# EAGLE board STEM (EAGLE 8.3.2)
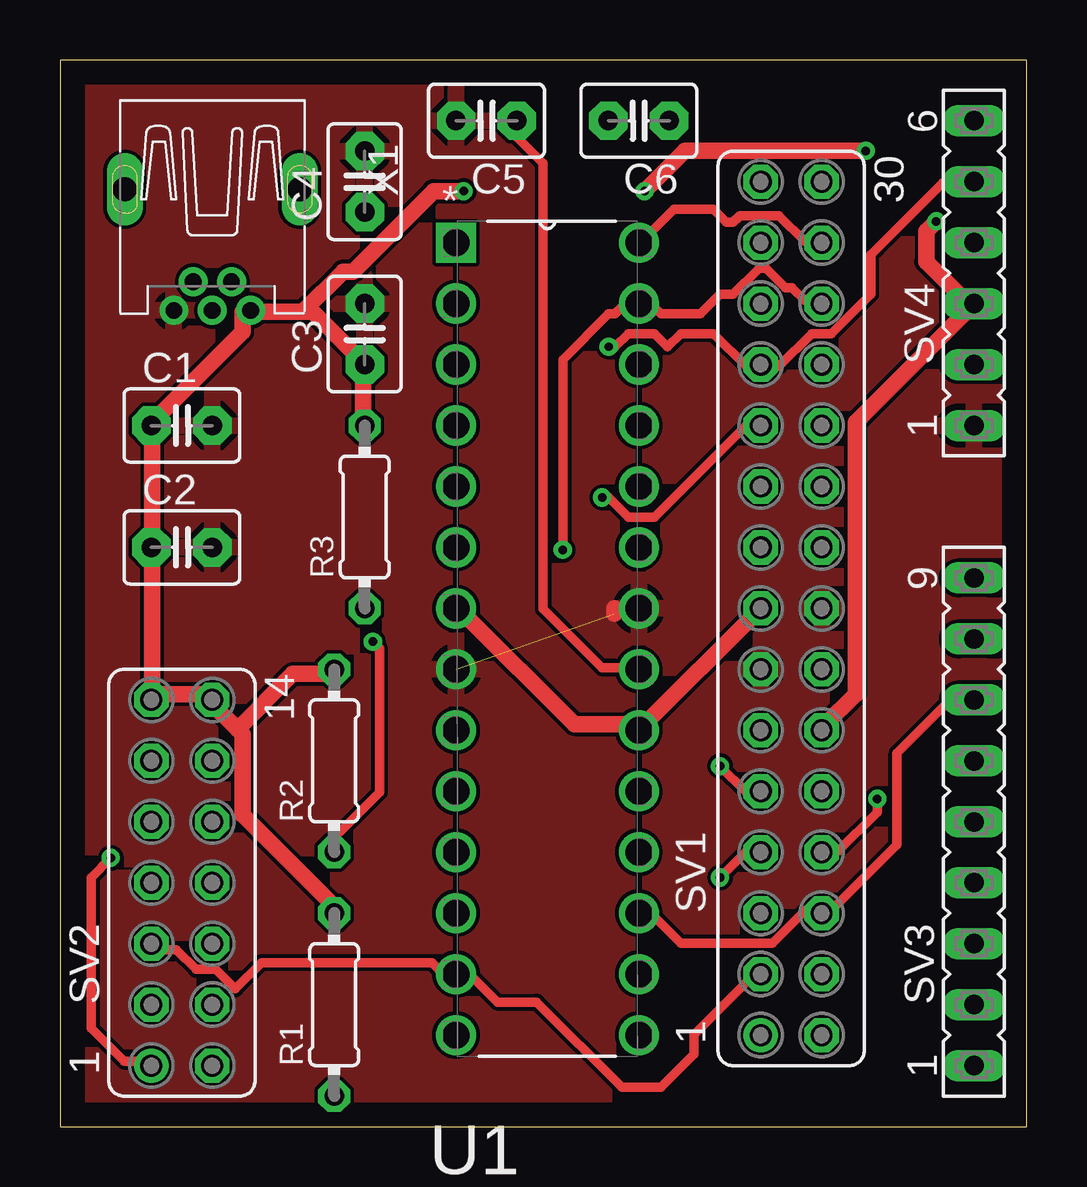
[diagram p0: board, top side]
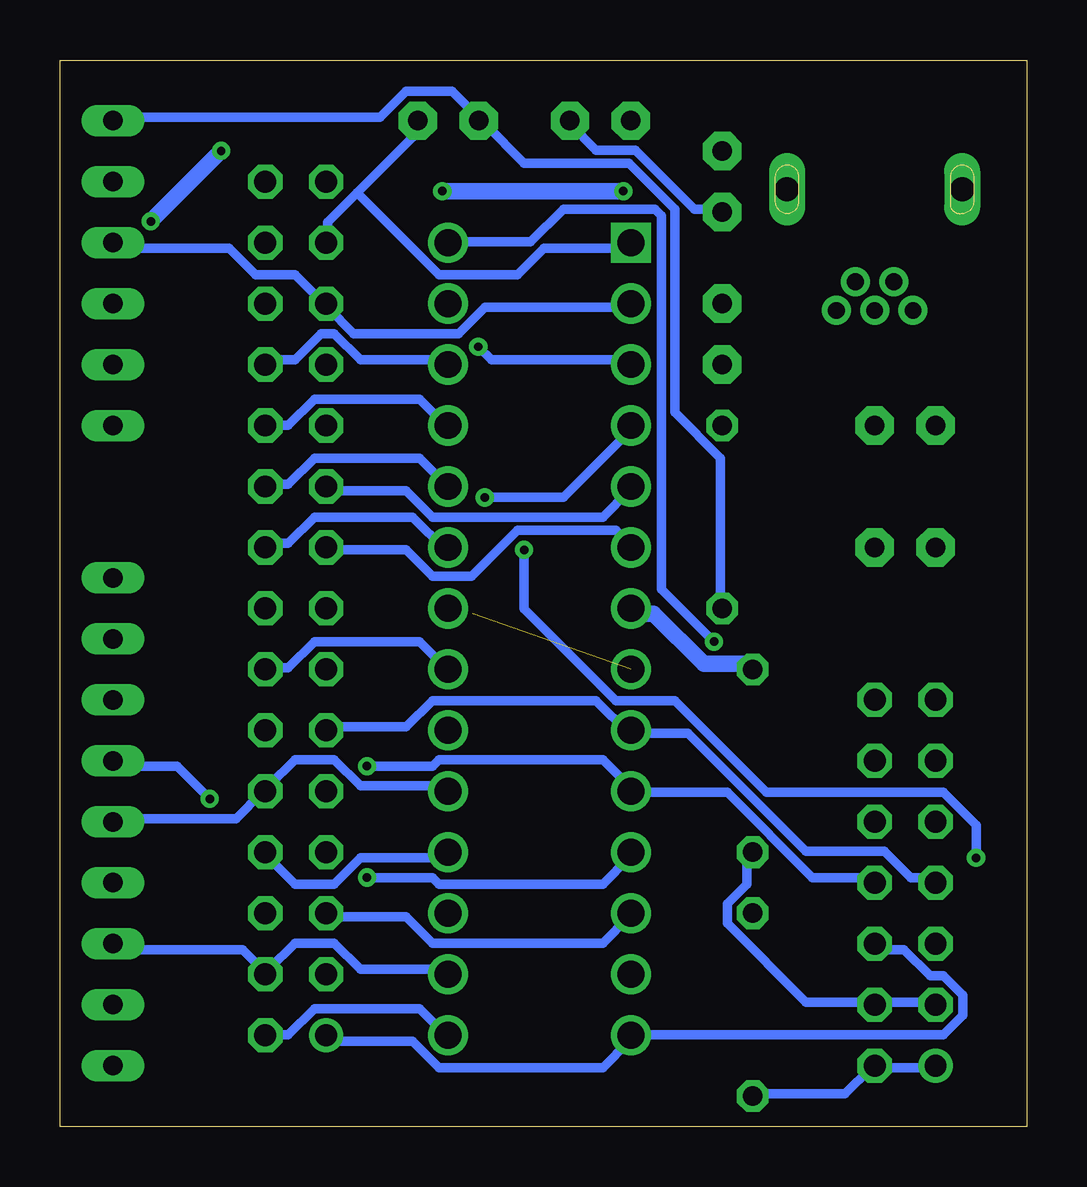
[diagram p1: board, bottom side, seen from below]

Size 40.31 x 44.44 mm. Coordinates in mm from the lower left corner, seen from the top.
Outline: 0,0 40.31,0 40.31,44.44 0,44.44 0,0
Copper layers (1*16): Top 0.035mm / dielectric 1.5mm / Bottom 0.035mm
Design rules "default *": minimum track width 27mil, minimum drill 0.35mm, track to track 6mil, track to pad 6mil, pad to pad 6mil, via to via 6mil, smd to smd 6mil, copper to edge 40mil, drill to drill 6mil, minimum pad ring 10mil, minimum via ring 8mil, stop-mask expansion 4mil, vias tented up to drill 0mil, thermal gap 10mil

## Footprints (pad centres in the part's own frame; a part is rotated, then mirrored left to right if it is on the bottom)
C2.5-3 = drill 0.813 pad 1.6 octagon: 1 -1.27,0; 2 1.27,0
0204/7 = drill 0.813 octagon: 1 -3.81,0; 2 3.81,0
FE15-2 = drill 0.914: 1 -17.78,1.27 | drill 0.914 octagon: 2 -17.78,-1.27; 3 -15.24,1.27; 4 -15.24,-1.27; 5 -12.7,1.27; 6 -12.7,-1.27; 7 -10.16,1.27; 8 -10.16,-1.27; 9 -7.62,1.27; 10 -7.62,-1.27; 11 -5.08,1.27; 12 -5.08,-1.27; 13 -2.54,1.27; 14 -2.54,-1.27; 15 0,1.27; 16 0,-1.27; 17 2.54,1.27; 18 2.54,-1.27; 19 5.08,1.27; 20 5.08,-1.27; 21 7.62,1.27; 22 7.62,-1.27; 23 10.16,1.27; 24 10.16,-1.27; 25 12.7,1.27; 26 12.7,-1.27; 27 15.24,1.27; 28 15.24,-1.27; 29 17.78,1.27; 30 17.78,-1.27
FE07-2 = drill 0.914: 1 -7.62,1.27 | drill 0.914 octagon: 2 -7.62,-1.27; 3 -5.08,1.27; 4 -5.08,-1.27; 5 -2.54,1.27; 6 -2.54,-1.27; 7 0,1.27; 8 0,-1.27; 9 2.54,1.27; 10 2.54,-1.27; 11 5.08,1.27; 12 5.08,-1.27; 13 7.62,1.27; 14 7.62,-1.27
FE09 = drill 0.813 long: 1 -10.16,0; 2 -7.62,0; 3 -5.08,0; 4 -2.54,0; 5 0,0; 6 2.54,0; 7 5.08,0; 8 7.62,0; 9 10.16,0
FE06 = drill 0.813 long: 1 -6.35,0; 2 -3.81,0; 3 -1.27,0; 4 1.27,0; 5 3.81,0; 6 6.35,0
DIP254P762X457-28 = drill 1.118 square: 1 -7.62,33.02 | drill 1.118: 2 -7.62,30.48; 3 -7.62,27.94; 4 -7.62,25.4; 5 -7.62,22.86; 6 -7.62,20.32; 7 -7.62,17.78; 8 -7.62,15.24; 9 -7.62,12.7; 10 -7.62,10.16; 11 -7.62,7.62; 12 -7.62,5.08; 13 -7.62,2.54; 14 -7.62,0; 15 0,0; 16 0,2.54; 17 0,5.08; 18 0,7.62; 19 0,10.16; 20 0,12.7; 21 0,15.24; 22 0,17.78; 23 0,20.32; 24 0,22.86; 25 0,25.4; 26 0,27.94; 27 0,30.48; 28 0,33.02
32005-601 = drill 0.7 pad 1.016: 1 2.825,1.6; 2 1.625,0.8; 3 2.825,0; 4 1.625,-0.8; 5 2.825,-1.6 | drill 1 pad 1.422 long: M1 -2.225,3.65; M2 -2.225,-3.65

## Placement (x,y rotation side)
C1  [C2.5-3]  5.08,29.21 0 top
C2  [C2.5-3]  5.08,24.13 0 top
C3  [C2.5-3]  12.7,33.02 90 top
C4  [C2.5-3]  12.7,39.37 90 top
C5  [C2.5-3]  17.78,41.91 180 top
C6  [C2.5-3]  24.13,41.91 180 top
R1  [0204/7]  11.43,5.08 90 top
R2  [0204/7]  11.43,15.24 90 top
R3  [0204/7]  12.7,25.4 90 top
SV1  [FE15-2]  30.48,21.59 90 top
SV2  [FE07-2]  5.08,10.16 90 top
SV3  [FE09]  38.1,12.7 90 top
SV4  [FE06]  38.1,35.56 90 top
U1  ATMEGA328P-PU  [DIP254P762X457-28]  24.13,3.81 0 top
X1  MINI-USB_SHIELD5P2-32005-601  [32005-601]  6.35,36.83 270 top

## Library data of the parts
C1-C6 = capacitor-wima
R1-R3 = rcl
SV1-SV4 = con-lsta; OC_FARNELL: unknown; OC_NEWARK: unknown
U1 = Atmel_By_element14_Batch_1-00; MPN: ATMEGA328P-PU; OC_FARNELL: 1715487; OC_NEWARK: 15R0268; PACKAGE: PDIP-28; SUPPLIER: Atmel
X1 = con-cypressindustries; OC_FARNELL: unknown; OC_NEWARK: unknown

## Nets
AREF: C4.1 C5.1 SV1.14 U1.21
GND: C1.2 C2.2 C3.2 C4.2 C5.2 SV1.13 SV1.16 SV4.1 U1.8 U1.22 X1.5
PB0: SV1.1 SV2.6 U1.14
PB1: SV1.2 U1.15
PB2: SV1.4 SV3.3 U1.16
PB3: SV1.6 SV3.7 U1.17
PB4: SV1.8 SV3.6 U1.18
PB5: SV1.10 SV3.5 U1.19
PB6: SV1.11 SV2.7 U1.9
PB7: SV1.9 SV2.8 U1.10
PC0: SV1.18 U1.23
PC1: SV1.20 U1.24
PC2: SV1.22 U1.25
PC3: SV1.24 U1.26
PC4: R1.1 SV1.26 SV2.1 SV2.2 U1.27
PC5: R2.1 SV1.28 SV2.3 SV2.4 U1.28
PC6: C6.1 SV1.27 U1.1
PC62: C6.2 R3.1 SV4.6
PD0: SV1.25 SV4.4 U1.2
PD1: SV1.23 SV4.5 U1.3
PD2: SV1.21 U1.4
PD3: SV1.19 U1.5
PD4: SV1.17 U1.6
PD5: SV1.7 U1.11
PD6: SV1.5 U1.12
PD7: SV1.3 SV2.5 U1.13
VCC: C1.1 C2.1 C3.1 R1.2 R2.2 R3.2 SV1.12 SV1.15 SV2.13 SV2.14 SV4.3 U1.7 U1.20 X1.1

## Tracks (layer width: path | path; a pad name or v marks a point on that pad's centre or on a via)
AREF
  Top 0.394: C5.1 19.05,41.23 20.14,40.14 20.14,21.57 22.6,19.11 23.96,19.11 U1.21
  Bottom 0.394: SV1.14 31.61,19.11 30.79,19.11 29.7,20.21 25.33,20.21 24.24,19.11 U1.21 | C4.1 12.77,38.23 13.86,38.23 16.32,40.68 17.96,40.68 19.05,41.78 C5.1
GND  (1 unrouted)
  Top 0.686: 23.11,21.37 23.11,21.59
  pour Top: 0,44.45 40.64,44.45 40.64,0 0,0
PB0
  Bottom 0.394: SV2.6 6.22,7.37 5.12,7.37 4.03,6.28 3.49,6.28 2.67,5.46 2.67,4.64 3.49,3.82 16.32,3.82 U1.14 16.59,3.55 17.68,2.46 24.51,2.46 25.6,3.55 29.15,3.55 SV1.1
PB1
  Bottom 0.394: SV1.2 31.61,3.82 30.79,3.82 29.7,4.92 25.33,4.92 24.24,3.82 U1.15
PB2
  Bottom 0.394: SV3.3 37.89,7.37 32.7,7.37 31.88,6.55 SV1.4 31.61,6.55 30.52,7.64 28.88,7.64 27.79,6.55 24.24,6.55 U1.16
PB3
  Top 0.394: SV3.7 37.89,17.75 37.07,17.75 34.89,15.56 34.89,11.74 31.88,8.74 SV1.6 31.61,9.01 31.06,9.01 29.7,7.64 25.88,7.64 24.78,8.74 24.24,8.74 U1.17
PB4  (via drill 0.35)
  Top 0.394: v34.07,13.65 34.07,13.11 32.43,11.47 31.88,11.47 SV1.8
  Bottom 0.394: v34.07,13.65 35.43,15.02 37.89,15.02 SV3.6 | U1.18 24.24,11.2 27.79,11.2 28.88,10.1 30.52,10.1 31.61,11.2 SV1.8
PB5
  Bottom 0.394: SV3.5 37.89,12.83 32.98,12.83 31.88,13.93 SV1.10 31.61,14.2 30.52,15.29 28.88,15.29 27.79,14.2 24.24,14.2 U1.19
PB6
  Bottom 0.394: SV2.7 4.03,10.38 4.85,10.38 5.94,11.47 9.22,11.47 14.13,16.38 16.32,16.38 U1.9 16.59,16.38 17.96,17.75 24.78,17.75 25.88,16.66 29.15,16.66 SV1.11
PB7  (via drill 0.35)
  Top 0.394: v27.52,15.02 28.61,13.93 29.15,13.93 SV1.9
  Bottom 0.394: SV2.8 6.49,10.38 8.95,10.38 12.5,13.93 16.32,13.93 U1.10 16.59,14.2 17.68,15.29 24.51,15.29 24.78,15.02 v27.52,15.02
PC0
  Bottom 0.394: SV1.18 31.61,24.3 30.79,24.3 29.7,25.39 25.6,25.39 24.24,24.03 U1.23
PC1
  Bottom 0.394: SV1.20 31.61,26.76 30.79,26.76 29.7,27.85 25.33,27.85 24.24,26.76 U1.24
PC2
  Bottom 0.394: SV1.22 31.61,29.22 30.79,29.22 29.7,30.31 25.33,30.31 24.24,29.22 U1.25
PC3
  Bottom 0.394: SV1.24 31.61,31.95 30.52,31.95 29.43,33.04 28.88,33.04 27.79,31.95 24.24,31.95 U1.26
PC4  (via drill 0.35)
  Top 0.394: SV1.26 31.61,34.4 31.06,34.4 30.52,34.95 30.25,34.95 29.43,35.77 29.15,35.77 28.06,34.68 27.52,34.68 26.7,33.86 25.06,33.86 24.78,34.13 24.24,34.13 U1.27 23.96,34.13 23.42,34.13 23.15,33.86 22.87,33.86 20.96,31.95 v20.96,24.03 | v2.12,11.2 1.3,10.38 1.3,4.1 2.67,2.73 3.76,2.73 SV2.1
  Bottom 0.394: R1.1 11.41,1.36 7.58,1.36 6.49,2.46 SV2.2 6.22,2.46 4.03,2.46 SV2.1 | v2.12,11.2 2.12,12.56 3.49,13.93 10.86,13.93 14.68,17.75 17.14,17.75 20.96,21.57 v20.96,24.03
PC5  (via drill 0.35)
  Top 0.394: SV1.28 31.61,36.86 31.06,36.86 29.97,37.95 28.33,37.95 28.06,37.68 27.79,37.68 27.24,38.23 25.6,38.23 24.24,36.86 U1.28 | v13.04,20.21 13.32,19.93 13.32,13.93 11.41,12.01 11.41,11.47 R2.1
  Bottom 0.394: R2.1 11.68,11.2 11.68,10.1 12.5,9.28 12.5,8.46 9.22,5.19 6.49,5.19 SV2.4 6.22,5.19 4.03,5.19 SV2.3 | v13.04,20.21 15.23,22.39 15.23,37.95 15.5,38.23 19.32,38.23 20.69,36.86 23.96,36.86 U1.28
PC6
  Bottom 0.394: 27.92,38.91 25.6,41.23 25.6,41.78 C6.1 | 27.92,38.91 29.15,37.68 29.15,36.86 SV1.27 | 27.92,38.91 24.51,35.5 21.23,35.5 20.14,36.59 16.59,36.59 U1.1
PC62
  Bottom 0.394: R3.1 12.77,21.84 12.77,27.85 14.68,29.76 14.68,38.23 16.59,40.14 20.96,40.14 22.6,41.78 C6.2 22.87,42.05 23.96,43.14 25.88,43.14 26.97,42.05 37.89,42.05 SV4.6
PD0
  Bottom 0.394: SV4.4 37.89,36.59 33.25,36.59 32.16,35.5 30.52,35.5 29.43,34.4 SV1.25 29.15,34.13 28.06,33.04 23.69,33.04 22.6,34.13 16.59,34.13 U1.2
PD1  (via drill 0.35)
  Top 0.394: SV4.5 37.89,39.32 36.8,39.32 33.8,36.32 33.8,34.68 32.16,33.04 31.34,33.04 29.97,31.67 29.43,31.67 SV1.23 29.15,31.67 28.61,31.67 27.24,33.04 25.88,33.04 25.33,32.49 24.78,33.04 23.69,33.04 23.15,32.49 v22.87,32.49
  Bottom 0.394: v22.87,32.49 22.33,31.95 16.59,31.95 U1.3
PD2  (via drill 0.35)
  Top 0.394: v22.6,26.21 22.87,26.21 23.69,25.39 24.78,25.39 28.61,29.22 29.15,29.22 SV1.21
  Bottom 0.394: v22.6,26.21 19.32,26.21 16.59,28.94 U1.4
PD3
  Bottom 0.394: SV1.19 29.15,26.49 25.88,26.49 24.78,25.39 17.68,25.39 16.59,26.49 U1.5
PD4
  Bottom 0.394: SV1.17 29.15,24.03 25.88,24.03 24.78,22.94 23.15,22.94 21.23,24.85 17.14,24.85 16.59,24.3 U1.6
PD5  (via drill 0.35)
  Top 0.394: v27.52,10.38 28.61,11.47 29.15,11.47 SV1.7
  Bottom 0.394: v27.52,10.38 24.78,10.38 24.51,10.1 17.68,10.1 16.59,11.2 U1.11
PD6
  Bottom 0.394: SV1.5 29.15,8.74 25.88,8.74 24.78,7.64 17.68,7.64 16.59,8.74 U1.12
PD7
  Top 0.394: SV2.5 4.03,7.37 4.85,7.37 5.67,6.55 6.49,6.55 7.31,5.73 8.4,6.83 15.5,6.83 15.77,6.55 16.32,6.55 U1.13 16.59,6.28 17.14,6.28 18.23,5.19 19.87,5.19 23.42,1.64 25.06,1.64 26.42,3 26.42,3.82 28.88,6.28 29.15,6.28 SV1.3
VCC  (via drill 0.35)
  Top 0.686: SV1.12 31.91,16.76 33.17,18.02 33.17,29.34 37.78,33.95 SV4.3 37.78,34.37 36.11,36.04 36.11,37.3 v36.52,37.72 | SV1.15 28.98,21.37 24.37,16.76 U1.20 23.95,16.76 21.44,16.76 16.83,21.37 U1.7 | 10.12,33.95 10.54,33.95 12.64,31.85 C3.1 12.64,31.43 12.64,29.34 R3.2 | 10.12,33.95 8.03,33.95 X1.1 7.61,33.95 7.61,33.11 3.84,29.34 C1.1 3.84,28.92 3.84,24.31 C2.1 3.84,23.89 3.84,18.02 | 7.4,16.55 6.35,17.6 SV2.14 6.35,18.02 3.84,18.02 | 7.4,16.55 7.61,16.34 7.61,12.99 11.38,9.22 R1.2 | 7.4,16.55 9.7,18.86 11.38,18.86 R2.2 | 3.84,18.02 SV2.13 | v33.59,40.65 26.05,40.65 v24.37,38.98 | v16.83,38.98 15.57,38.98 12.22,35.62 11.8,35.62 10.12,33.95
  Bottom 0.686: U1.7 16.41,21.37 15.57,21.37 13.47,19.28 11.8,19.28 R2.2 | v33.59,40.65 v36.52,37.72 | v16.83,38.98 v24.37,38.98